# Altium PCB FLYBACK_SWITCHING_POWER_SUPPLY_V1_3.PcbDoc
Units mil, origin at the board's own origin, x right, y up, seen from the top; angles counter-clockwise.
Board outline 2725 x 1500 mil, 2 copper layers (Top Layer, Bottom Layer); 32 components, 20 nets, 77 pads, 0 vias.
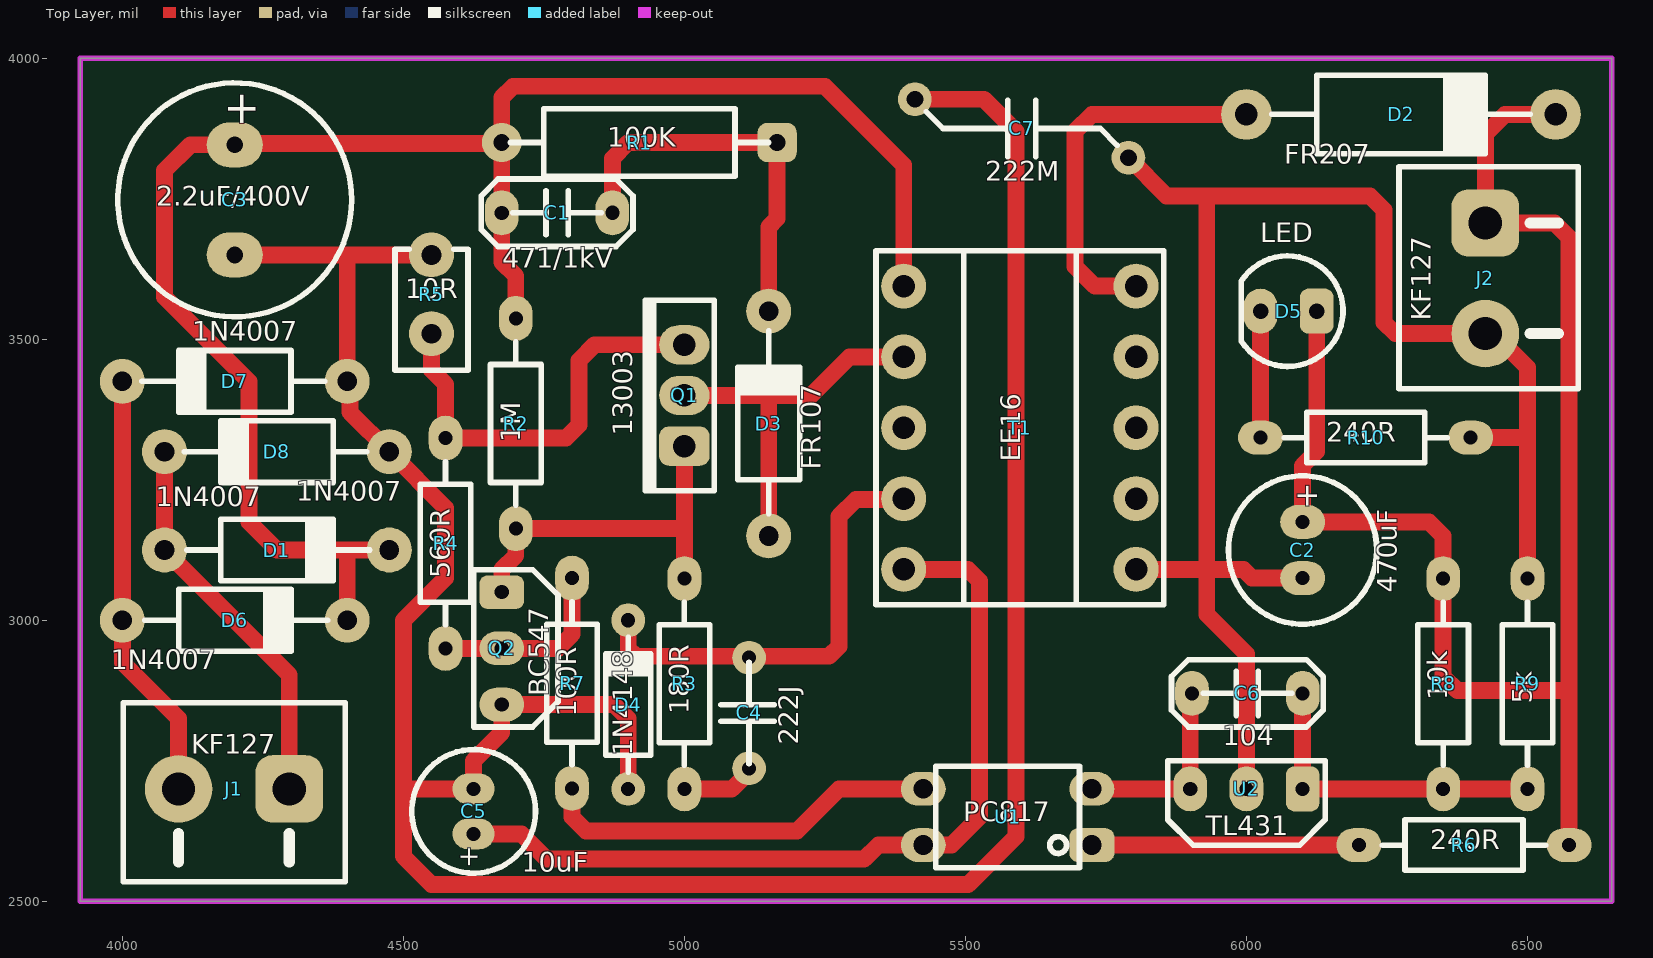
[diagram p0: Top Layer view]
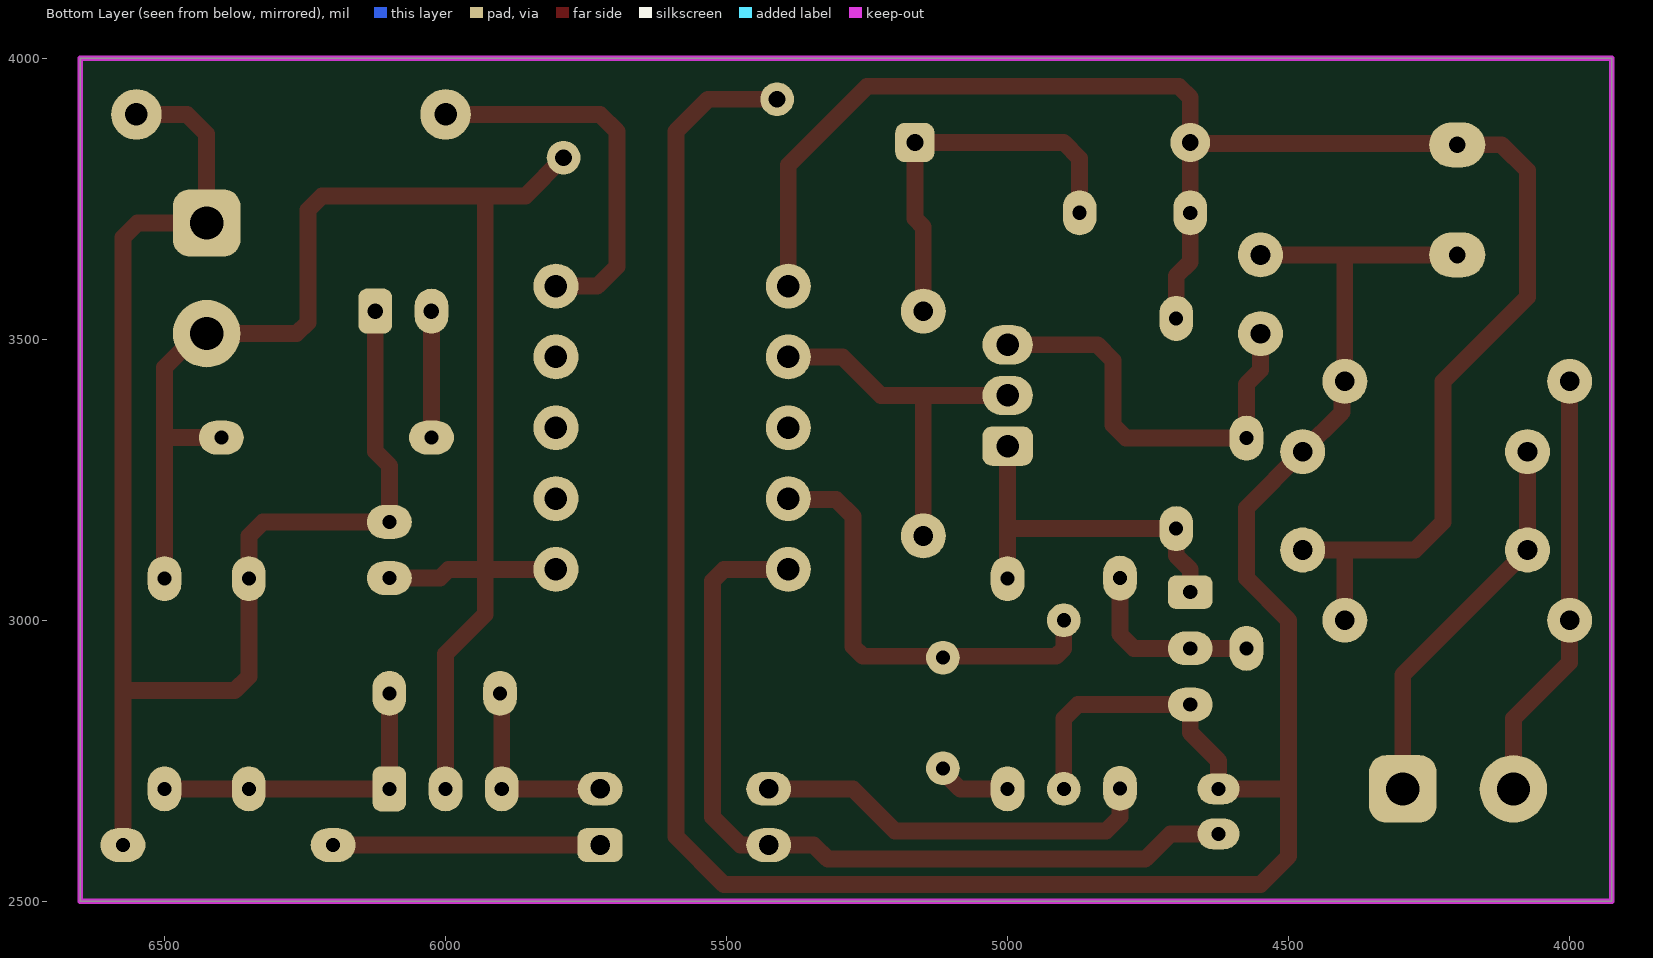
[diagram p1: Bottom Layer view, seen from below]
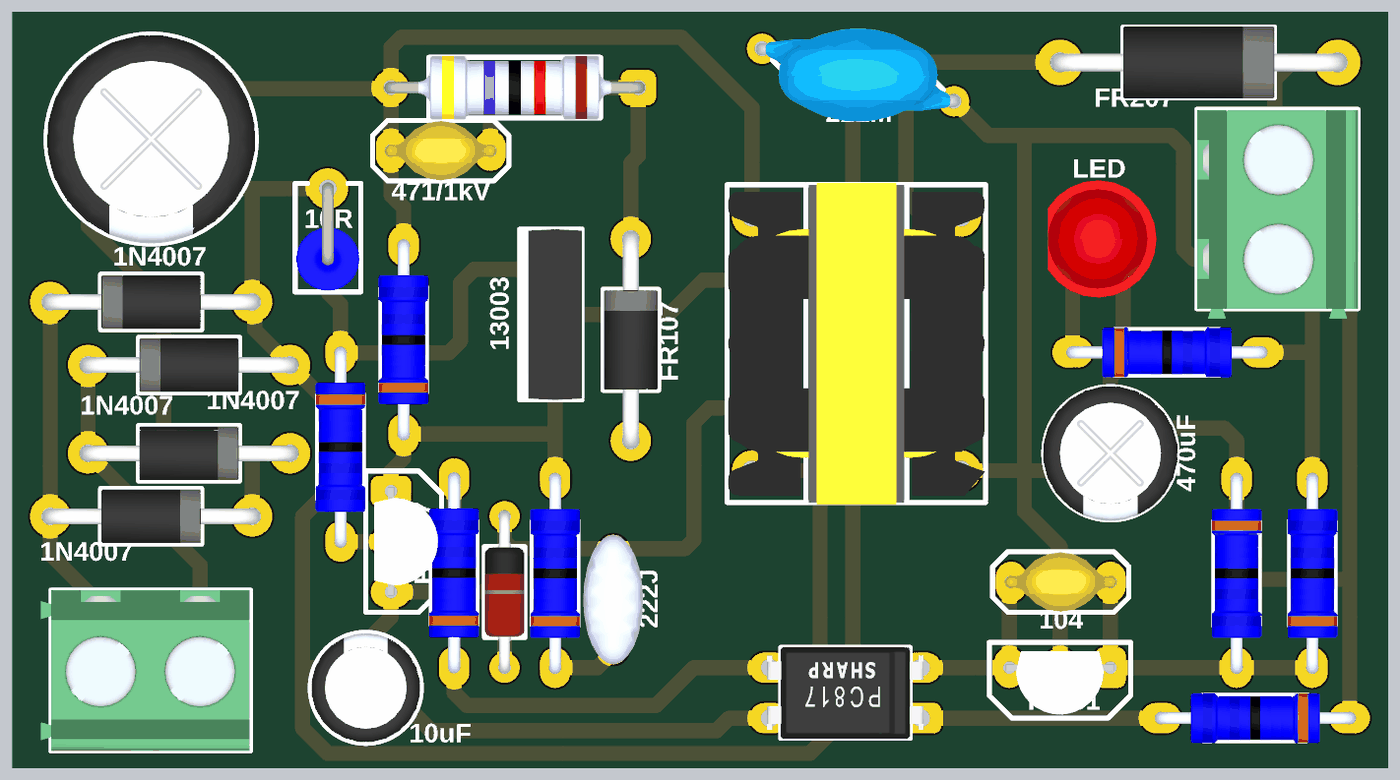
[diagram p2: 3D render of the assembled board from above, using the file's embedded part models]

## Layer stack, top to bottom
Top Solder: solder mask 0.4, Solder Resist, Dk 3.5
Top Layer: signal copper 1.4
Dielectric 1: dielectric 12.6, FR-4, Dk 4.8
Bottom Layer: signal copper 1.4
Bottom Solder: solder mask 0.4, Solder Resist, Dk 3.5

## Board outline
3925,2500 3925,4000 6650,4000 6650,2500

## Design rules (kind name [scope] priority, off if disabled: settings)
Clearance [All] p1: gap=10 ignorepadtopadclearanceinfootprint=FALSE except(0: Arc-Hole Track-Hole SMDPad-Hole THPad-Hole Via-Hole Fill-Hole Poly-Hole Region-Hole Text-Hole)
PolygonConnect [All] p1: connectstyle=Relief reliefconductorwidth=10 reliefentries=4 polygonreliefangle="90 Angle" airgapwidth=10
RoutingVias [All] p1: holewidth=28 width=50 viastyle="Through Hole" minholewidth=28 minwidth=50 maxholewidth=28 maxwidth=50
SolderMaskExpansion [All] p1: expansion=4 istentingtop=FALSE
Width [All] p1: maxlimit=50 minlimit=10 preferedwidth=30
30 further rules are at their usual default settings.

## Components (designator, comment, footprint, x,y, rotation, side; value= is the part's Value field where it differs from the comment)
C1 "471/1kV" CAP_Ceramic_5MM 4773.43,3725 r180 top
C2 "470uF" CAP_RAD_D06.3x11 6100,3125 r270 top
C3 "2.2uF/400V" CAP_RAD_D10x12.5 4200,3748 r270 top
C4 "222J" CAP-FILM-5MM 5115,2835 r90 top
C5 "10uF" CAP_RAD_D05x11 4625,2660 r90 top
C6 "104" CAP_Ceramic_5MM 6001.57,2870 r0 top
C7 "222M" CAP_Ceramic_473M_9.65mm 5600,3875 r0 top
D1 "1N4007" DO-204AL-BK 4275,3125 r0 top
D2 "FR207" DO-204AC-BK 6275,3900 r0 top
D3 "FR107" DO-204AL-BK 5150,3350 r90 top
D4 "1N4148" DO-204AH-RD 4900,2850 r90 top
D5 "LED" LED_5MM 6075,3550 r180 top
D6 "1N4007" DO-204AL-BK 4200,3000 r0 top
D7 "1N4007" DO-204AL-BK 4200,3425 r180 top
D8 "1N4007" DO-204AL-BK 4275,3300 r180 top
J1 "KF127" DG127-5.0-02P-14-00AH 4296.85,2700 r180 top
J2 "KF127" DG127-5.0-02P-14-00AH 6425,3706.85 r270 top
Q1 "13003" TO-126 5000,3400 r90 top
Q2 "BC547" TO-92 4675,2950 r270 top
R1 "100K" RES-0.5W-H 4920,3850 r180 top
R2 "1M" RES-0.25W-H 4700,3350 r90 top
R3 "180R" RES-0.25W-H 5000,2887 r90 top
R4 "560R" RES-0.25W-H 4575,3137 r270 top
R5 "10R" RES-0.5W-V 4550,3510 r90 top
R6 "240R" RES-0.25W-H 6387,2600 r180 top
R7 "100R" RES-0.25W-H 4800,2888 r90 top
R8 "10k" RES-0.25W-H 6350,2887 r270 top
R9 "5k" RES-0.25W-H 6500,2887 r90 top
R10 "240R" RES-0.25W-H 6212,3325 r0 top
T1 "EE16" TRANSFORMERS-EE16(5+5)-H 5596.85,3342.52 r0 top
U1 "PC817" PC817-DIP 5575,2650 r180 top
U2 "TL431" TO-92 6000,2700 r180 top

## Footprints (in the part's own frame and the unit in brackets; to place one, negate y for a bottom-side part, rotate by r counter-clockwise, add the part's x,y. Pads: shape width x height; smd on the part's side, far side on the other; paste and mask are expansions set on the pad)
CAP-FILM-5MM [mil]
  round 60 hole 25: 1(-98.43,0) 2(98.43,0)
  silkscreen extent -90,-45 90,50, body extent -128,-59 128,59, height 463
CAP_Ceramic_5MM [mil]
  oval 60x80 hole 25: 1(-98.43,0) 2(98.43,0)
  silkscreen extent -135,-60 135,60, body extent -110,-59 110,59, height 216
CAP_Ceramic_473M_9.65mm [mil]
  round 60 hole 30: 1(-190,52) 2(190,-52)
  silkscreen extent -170,-50 170,50, body extent -202,-93 202,93, height 354
CAP_RAD_D05x11 [mil]
  oval 55x75 hole 25: 1(-40,0) 2(40,0)
  silkscreen extent -110,-110 110,110, body extent -108,-108 108,108, height 492
CAP_RAD_D06.3x11 [mil]
  oval 60x80 hole 25: 1(-50,0) 2(50,0)
  silkscreen extent -132,-132 132,132, body extent -134,-134 134,134, height 492
CAP_RAD_D10x12.5 [mil]
  oval 80x100 hole 30: 1(-98,0) 2(98,0)
  silkscreen extent -208,-208 208,208, body extent -207,-207 207,207, height 551
DG127-5.0-02P-14-00AH [mil]
  rrect50% 120x120 hole 59.06: 1(0,0)
  round 120 hole 59.06: 2(196.85,0)
  silkscreen extent -100,-154 295,165, body extent -98,-154 315,165, height 398
DO-204AC-BK [mil]
  round 90 hole 40: 1(-275,0) 2(275,0)
  silkscreen extent -230,-70 230,70, body extent -293,-71 293,71, height 146
DO-204AH-RD [mil]
  round 60 hole 25: 1(-150,0) 2(150,0)
  silkscreen extent -120,-40 120,40, body extent -161,-39 161,39, height 82
DO-204AL-BK [mil]
  round 80 hole 35: 1(-200,0) 2(200,0)
  silkscreen extent -160,-55 165,55, body extent -216,-53 216,53, height 110
LED_5MM [mil]
  rrect50% 60x80 hole 27.56: 1(-50,0)
  oval 60x80 hole 27.56: 2(50,0)
  silkscreen extent -97,-98 84,98, body extent -116,-116 98,116, height 339
PC817-DIP [mil]
  rrect50% 80x60 hole 35: 1(-150,50)
  oval 80x60 hole 35: 2(-150,-50) 3(150,-50) 4(150,50)
  silkscreen extent -128,-90 128,90, body extent -155,-90 155,90, height 169
RES-0.5W-H [mil]
  rrect50% 70x70 hole 30: 1(-245,0)
  round 70 hole 30: 2(245,0)
  silkscreen extent -230,-60 230,60, body extent -258,-63 258,63, height 143
RES-0.5W-V [mil]
  round 80 hole 35: 1(0,0) 2(140,0)
  silkscreen extent -65,-65 150,65, body extent -63,-63 152,63, height 453
RES-0.25W-H [mil]
  oval 80x60 hole 25: 1(-187,0) 2(187,0)
  silkscreen extent -145,-45 145,45, body extent -199,-49 199,49, height 109
TO-92 [mil]
  rrect50% 60x80 hole 25: 1(-100,0)
  oval 60x80 hole 25: 2(0,0) 3(100,0)
  silkscreen extent -140,-50 140,100, body extent -107,-33 107,93, height 319
TO-126 [mil]
  rrect50% 70x90 hole 40: 1(-90.16,0)
  oval 70x90 hole 40: 2(0,0) 3(90.16,0)
  silkscreen extent -170,-53 170,70, body extent -169,-53 169,55, height 622
TRANSFORMERS-EE16(5+5)-H [mil]
  round 80 hole 40: 1(-206.69,251.97) 2(-206.69,125.98) 3(-206.69,0) 4(-206.69,-125.98) 5(-206.69,-251.97) 6(206.69,-251.97) 7(206.69,-125.98) 8(206.69,0) 9(206.69,125.98) 10(206.69,251.97)
  silkscreen extent -256,-315 256,315, body extent -254,-319 255,319, height 573

## Part data
C1 C6 C7: library part Capacitors(Disc)
C2 C3 C5: library part Capacitor(Radian)
C4: library part Capacitors(film)
D1 D6 D7 D8: library part Diode-1N4007
D2: library part Diode-FR207
D3: library part Diode-FR107, "1A 1000V"
D4: library part Diode-1N4148, "The fast switching diode"
D5: library part "LED 5MM"
J1 J2: library part DG127-5.0-02P-14-00AH
Q1: library part Transistor-MJE13003
Q2: library part Transistor-BC547, "VCEO: 45 Vdc / VCBO: 50 Vdc / VEBO: 6.0 Vdc"
R1 R2 R3 R4 R5 R6 R7 R8 R9 R10: library part "Resistors THD"
T1: library part TRANS-EE16-HORIZONTAL(5+5)
U1: library part Opto-PC817
U2: library part Ic-TL431

## Nets (pads, with @x,y where several pads share a name; then routed paths per layer and width w, separated by ;. In a path a pad name is that pad's centre, name@x,y a point inside that pad or via, vN(x,y) a via of type N, cw(c..) or ccw(c..) an arc to the next point about the centre after c; other vN are vias at no path point)
NetC1_1: C1.1 D3.2 R1.1 | length 707.9
  Top Layer w30: C1.1 4871.85,3821.85 4900,3850 R1.1 5165,3715 5150,3700 D3.2
NetC1_2: C1.2 C3.1 D1.2 D6.2 R1.2 R2.2 T1.1 | length 3103.8
  Top Layer w30: D6.2 4400,3125 ; D1.2 4400,3125 ; R2.2 4700,3612.5 4675,3637.5 C1.2 R1.2 ; T1.1 5390.16,3809.84 5250,3950 4695,3950 4675,3930 R1.2 ; 4400,3125 4275,3125 4225,3175 4225,3425 4075,3575 4075,3800 4121,3846 C3.1 4202,3848 4673,3848 R1.2
NetC2_1: C2.1 D2.2 D5.1 J2.1 R6.1 R8.1 | length 2668.4
  Top Layer w30: D5.1 6125,3300 6100,3275 C2.1 6325,3175 6350,3150 R8.1 6350,2900 6375,2875 6574,2875 ; D2.2 6460,3900 6425,3865 J2.1 6548.15,3706.85 6574,3681 6574,2875 ; R6.1 6574,2875
NetC2_2: C2.2 C7.2 J2.2 R9.2 R10.2 T1.6 U2.2 | length 2845.2
  Top Layer w30: C7.2 5858,3755 5929.45,3755 ; T1.6 5929.45,3090.55 ; U2.2 6000,2940 5929.45,3010.55 5929.45,3090.55 ; C2.2 6010,3075 5994.45,3090.55 5929.45,3090.55 ; R10.2 6500,3325 ; R9.2@6500,3087 6500,3325 ; 5929.45,3090.55 5929.45,3755 ; 5929.45,3755 6220,3755 6245,3730 6245,3530 6265,3510 6410,3510 6425,3525 6500,3450 6500,3325
NetC3_2: C3.2 C5.2 C7.1 D4.1 D7.1 D8.1 Q2.3 R5.2 | length 4784.1
  Top Layer w30: C3.2 4400,3650 ; R5.2 4400,3650 ; D4.1 4900,2825 4875,2850 Q2.3 4675,2800 4625,2750 C5.2 4500,2700 ; C7.1 5533,3927 5590,3870 5590,2615 5505,2530 4550,2530 4500,2580 4500,2700 ; 4400,3650 D7.1 4405,3420 4405,3370 D8.1 4575,3200 4575,3075 4500,3000 4500,2700
NetC4_1: C4.1 R3.1 | length 140.8
  Top Layer w30: R3.1 5084.31,2700 5122.46,2738.15 C4.1@5125,2738.15
NetC4_2: C4.2 D4.2 T1.4 | length 797.7
  Top Layer w30: D4.2 4900,2950 4914,2936 5257.43,2936 5275,2953.57 5275,3185 5305.16,3215.16 5388.78,3215.16 T1.4
NetC5_1: C5.1 T1.5 U1.4 | length 1513.1
  Top Layer w30: C5.1 4710,2620 4755,2575 5320,2575 5345,2600 5475,2600 5525,2650 5525,3070 5504.45,3090.55 T1.5
NetC6_1: C6.1 U1.2 U2.3 | length 345
  Top Layer w30: U1.2 U2.3 C6.1@5900,2870
NetC6_2: C6.2 R8.2 R9.1 U2.1 | length 570
  Top Layer w30: C6.2 U2.1 R8.2 R9.1
NetD1_1: D1.1 D8.2 J1.1 | length 691.9
  Top Layer w30: D8.2 D1.1 4296.85,2903.15 J1.1
NetD2_1: D2.1 T1.10 | length 681
  Top Layer w30: T1.10 5730,3594.49 5695,3629.49 5695,3870 5725,3900 D2.1
NetD3_1: D3.1 Q1.2 T1.2 | length 668.5
  Top Layer w30: Q1.2 5150,3400 ; D3.1 5150,3400 ; T1.2 5293.5,3468.5 5225,3400 5150,3400
NetD5_2: D5.2 R10.1 | length 225
  Top Layer w30: R10.1 D5.2
NetD6_1: D6.1 D7.2 J1.2 | length 766.4
  Top Layer w30: D7.2 D6.1 4000,2925 4100,2825 J1.2
NetQ1_1: Q1.1 Q2.1 R2.1 R3.2 | length 659.2
  Top Layer w30: Q2.1 4675,3090 4700,3115 R2.1 5000,3163 ; R3.2 5000,3163 ; Q1.1 5000,3163
NetQ1_3: Q1.3 R4.1 R5.1 | length 757.5
  Top Layer w30: R5.1 4550,3445 4575,3420 R4.1 4789,3324 4812.5,3347.5 4812.5,3462.5 4840.16,3490.16 Q1.3
NetQ2_2: Q2.2 R4.2 R7.2 | length 310.4
  Top Layer w30: R4.2@4600,2950 Q2.2 4775,2950 4800,2975 R7.2
NetR6_2: R6.2 U1.1 | length 475
  Top Layer w30: U1.1 R6.2
NetR7_1: R7.1 U1.3 | length 717.4
  Top Layer w30: R7.1 4800,2650 4825,2625 5200,2625 5275,2700 U1.3
pads on no net: T1.3 T1.7 T1.8 T1.9

## Keep-outs
Keep-Out Layer:
  the board outline again, w10

## Dimensions
6650,4000 to 6650,2500 on Mechanical 1
3925,4000 to 6650,4000 on Mechanical 1

## Text inside footprints (layer, text, board x,y; h text height)
C2: Top Overlay "+" at 6077.9,3244.68 h70 r270
C3: Top Overlay "+" at 4168.46,3943.38 h100 r270
C5: Top Overlay "+" at 4643.93,2558.57 h60 r90